# Altium PCB PCB1_I2C_datkll.PcbDoc
Units mil, origin at the board's own origin, x right, y up, seen from the top; angles counter-clockwise.
Board outline 3498.74 x 2755.91 mil, 2 copper layers (Top Layer, Bottom Layer); 9 components, 7 nets, 141 pads, 0 vias.
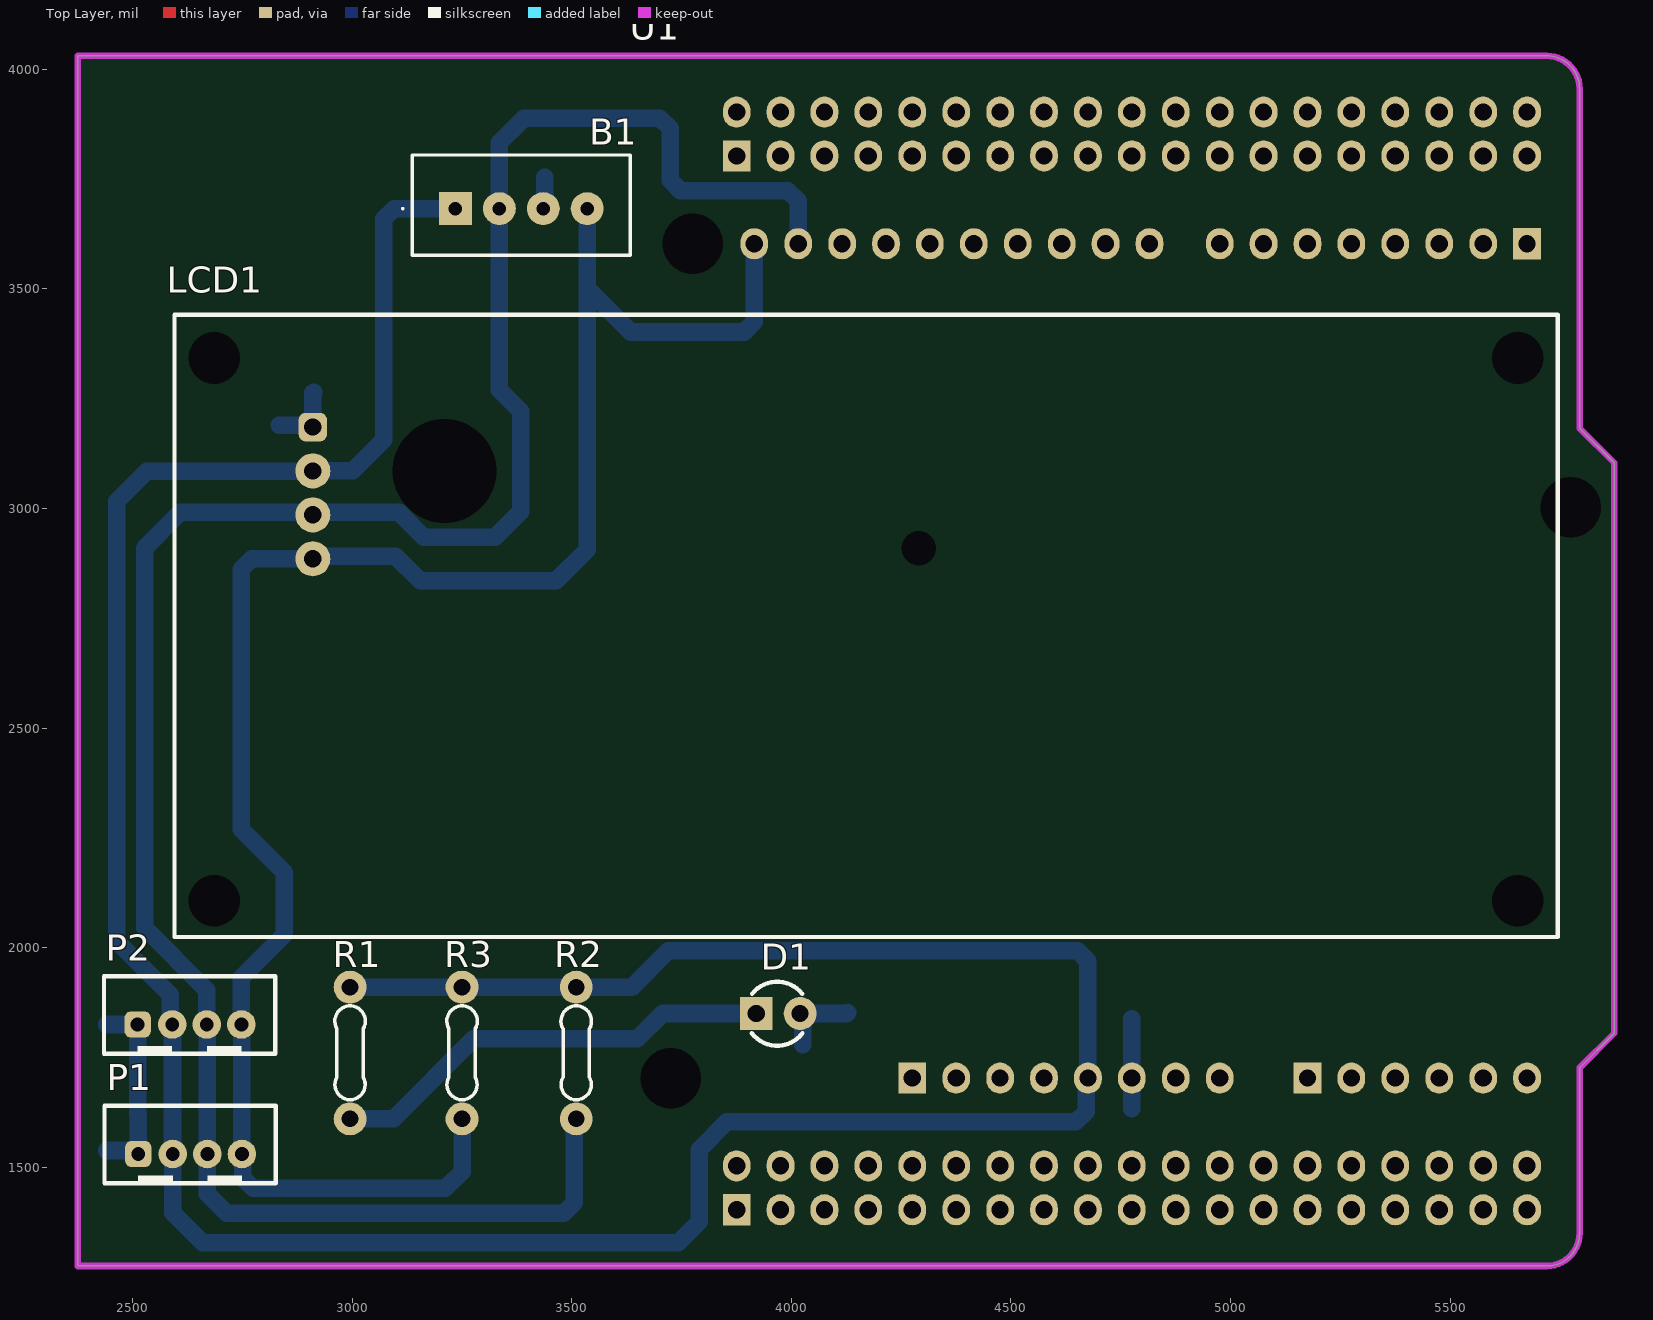
[diagram p0: Top Layer view]
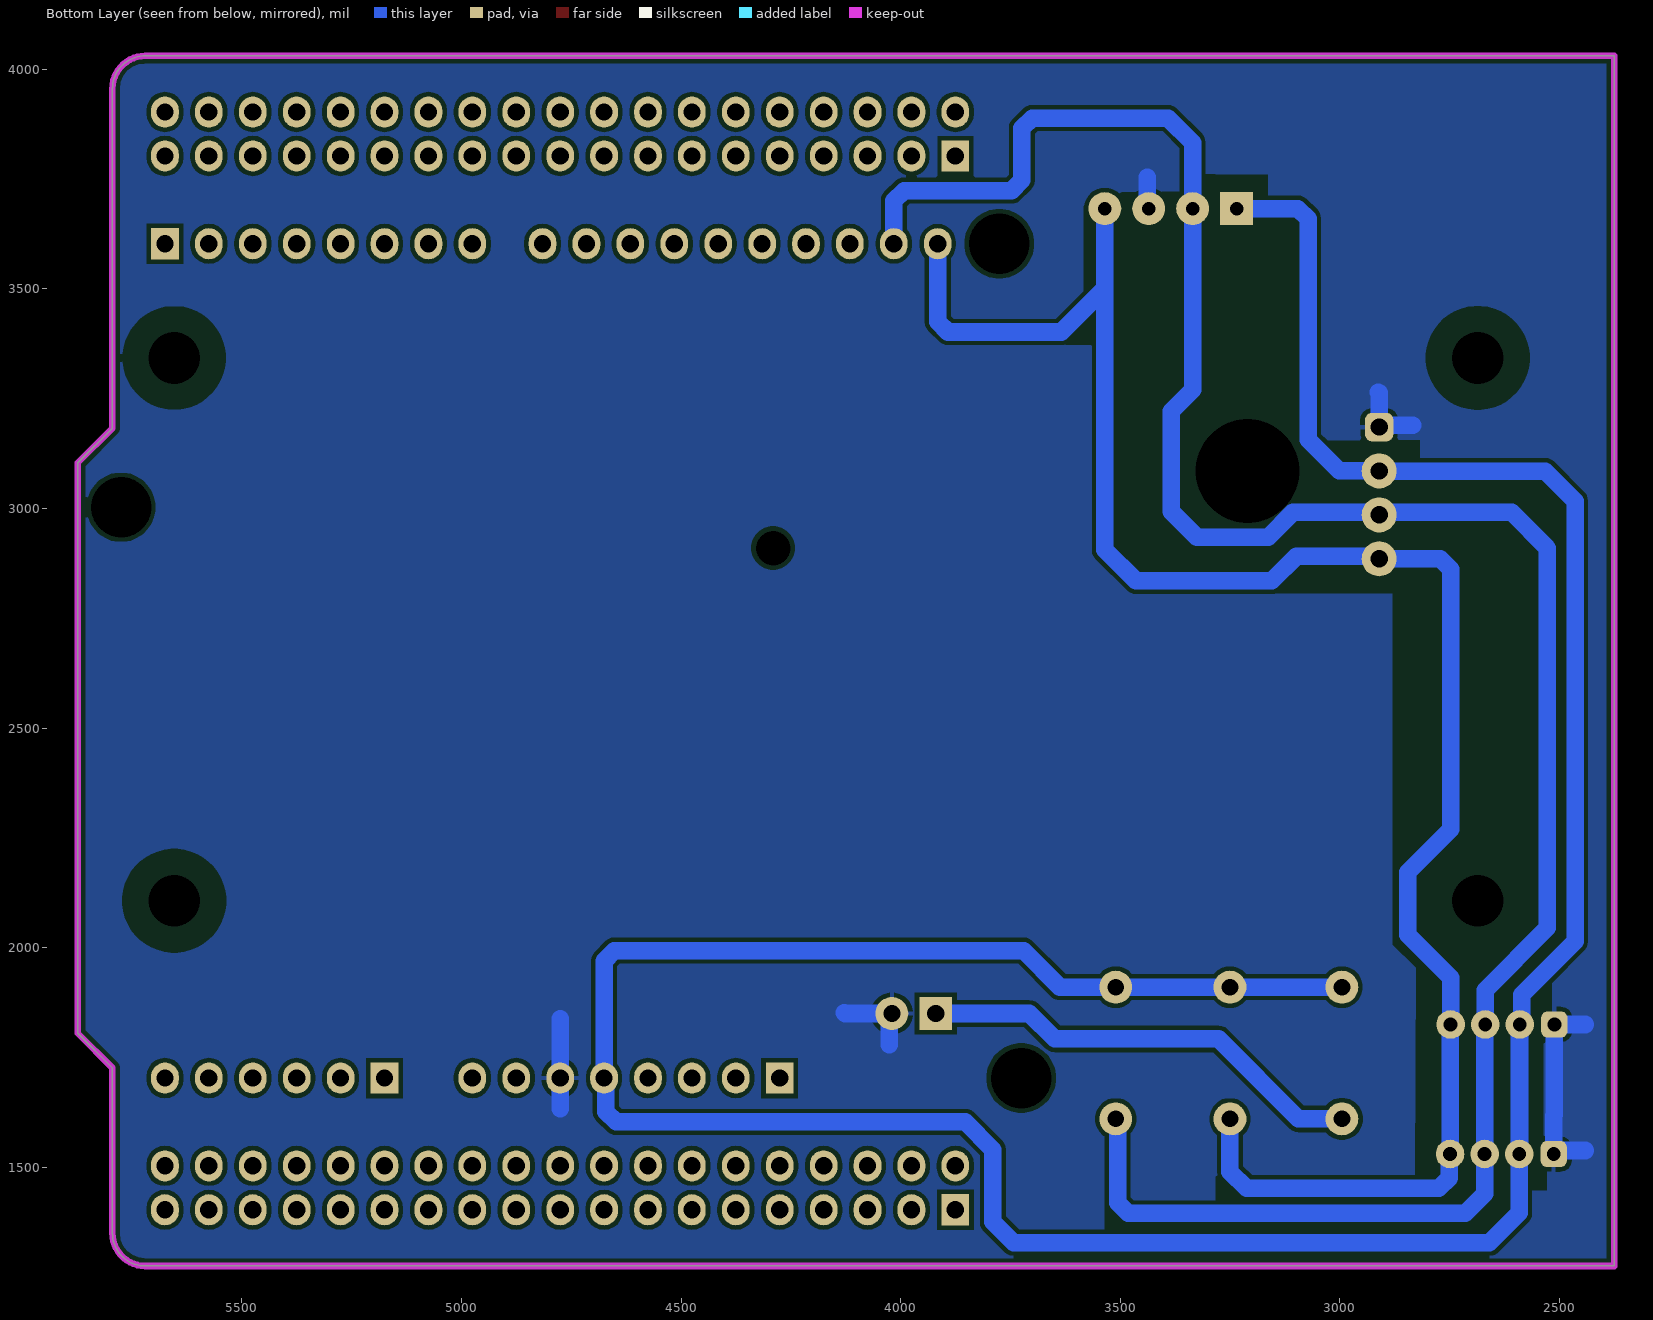
[diagram p1: Bottom Layer view, seen from below]
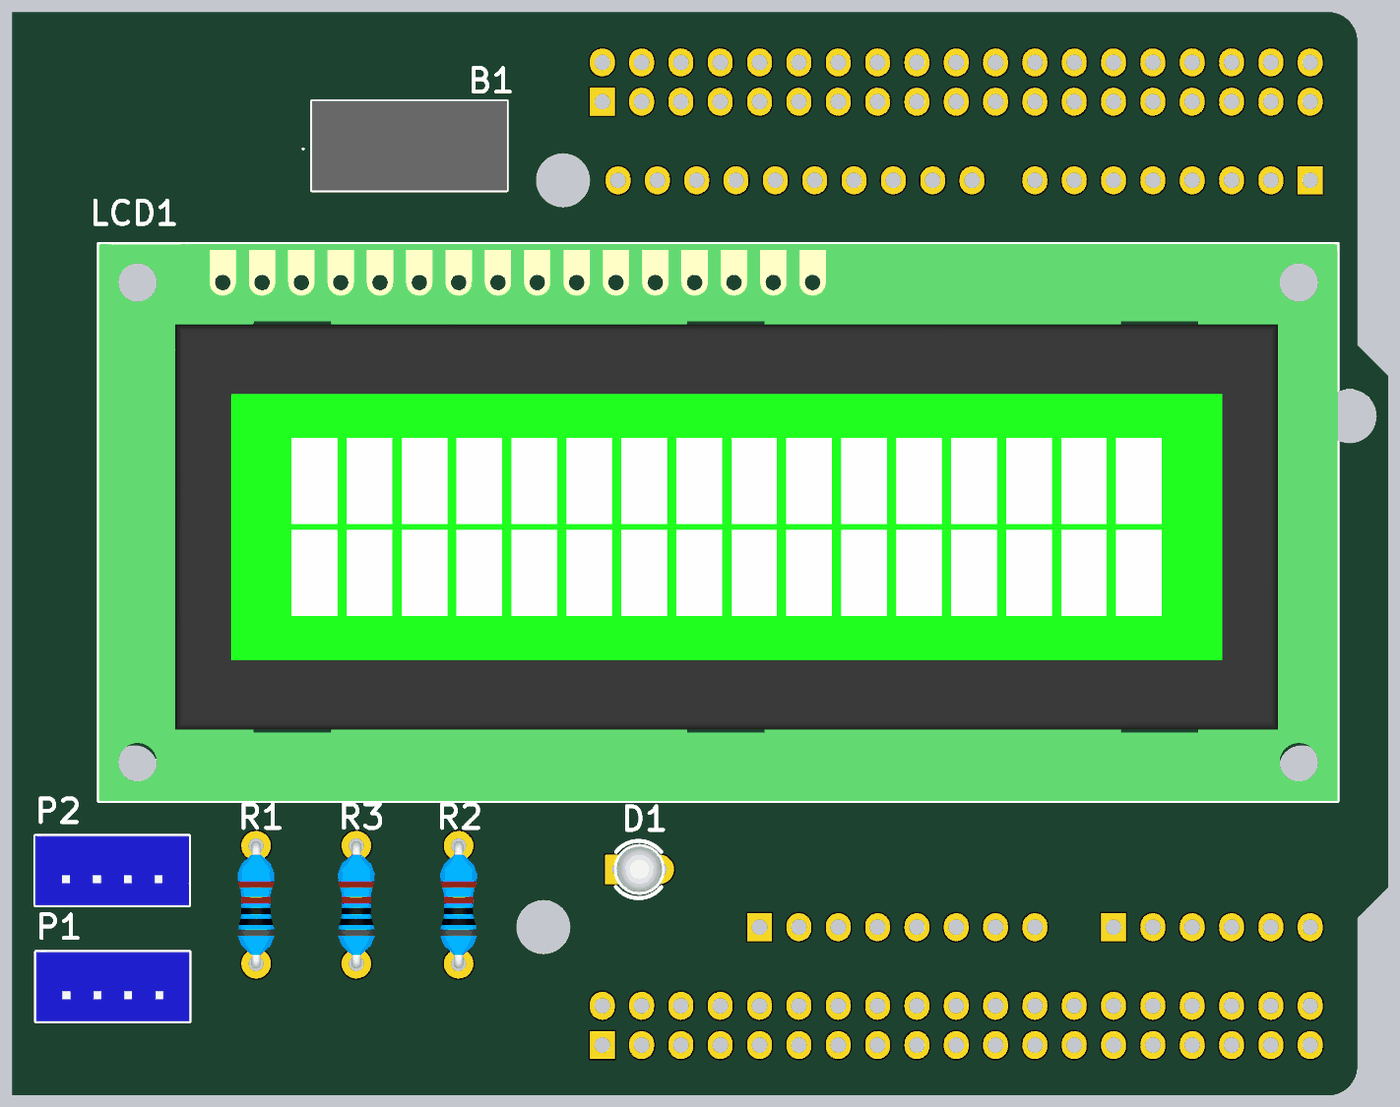
[diagram p2: 3D render of the assembled board from above, using the file's embedded part models]

## Layer stack, top to bottom
Top Solder: solder mask 0.4, Solder Resist, Dk 3.5
Top Layer: signal copper 1.4
Dielectric 1: dielectric 12.6, FR-4, Dk 4.8
Bottom Layer: signal copper 1.4
Bottom Solder: solder mask 0.4, Solder Resist, Dk 3.5

## Board outline
2375,1275 2375,4030.91 5720,4030.91 cw(c5720,3955.91) 5795,3955.91 5795,3182.87 5873.74,3104.13 5873.74,1804.92 5795,1726.18 5795,1350 cw(c5720,1350) 5720,1275

## Design rules (kind name [scope] priority, off if disabled: settings)
Clearance [All] p1: gap=10 ignorepadtopadclearanceinfootprint=FALSE
PolygonConnect [All] p1: connectstyle=Relief reliefconductorwidth=10 reliefentries=4 polygonreliefangle="90 Angle" airgapwidth=10
RoutingVias [All] p1: holewidth=28 width=50 viastyle="Through Hole" minholewidth=28 minwidth=50 maxholewidth=28 maxwidth=50
SolderMaskExpansion [All] p1: expansion=4 istentingtop=FALSE
Width [All] p1: maxlimit=50 minlimit=30 preferedwidth=40
30 further rules are at their usual default settings.

## Components (designator, comment, footprint, x,y, rotation, side; value= is the part's Value field where it differs from the comment)
B1 "DHT20" SEN18364 3235,3683 r0 top
D1 "Led" "LED 3MM - red" 3970,1850 r0 top
LCD1 "LCD 16x2" "LCD 1602A I2C" 4170,2719 r0 top
P1 "" HDR/Header/4/2mm/BOX 2630.63,1530 r0 top
P2 "Header 4" HDR/Header/4/2mm/BOX 2629.37,1825 r0 top
R1 "1k" "R 1/4W/300" 2995,1610 r90 top
R2 "4.7k" "R 1/4W/300" 3510,1610 r90 top
R3 "4.7k" "R 1/4W/300" 3250,1610 r90 top
U1 "NUCLEO-F103RB" NUCLEO 5795,1275 r90 top

## Footprints (in the part's own frame and the unit in brackets; to place one, negate y for a bottom-side part, rotate by r counter-clockwise, add the part's x,y. Pads: shape width x height; smd on the part's side, far side on the other; paste and mask are expansions set on the pad)
HDR/Header/4/2mm/BOX [mil]
  rrect50% 60x60 hole 31.5: 1(-118.11,0)
  round 65 hole 31.5: 2(-39.37,0) 3(39.37,0) 4(118.11,0)
  silkscreen extent -195,-67 195,110, body extent -195,-67 195,110, height 236
"LCD 1602A I2C" [mm]
  rrect50% 1.651x1.651 hole 1: 1(-32,11.85)
  round 2.032 hole 1: 2(-32,9.31) 3(-32,6.77) 4(-32,4.23)
  round 0 hole 6 unplated: HOLE(-24.38,9.31)
  round 0 hole 2 unplated: HOLE(3.06,4.85)
  round 0 hole 3 unplated: HOLG(37.7,-15.55) HOLH(-37.7,-15.55) HOLH(-37.7,15.85) HOLH(37.7,15.85)
  Top Layer pour cut-out: 34.7,15.85 34.928,14.702 35.579,13.729 36.552,13.078 37.7,12.85 37.7,12.85 38.848,13.078 39.821,13.729 40.472,14.702 40.7,15.85 40.7,15.85 40.472,16.998 39.821,17.971 38.848,18.622 37.7,18.85 37.7,18.85 36.552,18.622 35.579,17.971 34.928,16.998 34.7,15.85
  Top Layer pour cut-out: -40.7,15.85 -40.472,14.702 -39.821,13.729 -38.848,13.078 -37.7,12.85 -37.7,12.85 -36.552,13.078 -35.579,13.729 -34.928,14.702 -34.7,15.85 -34.7,15.85 -34.928,16.998 -35.579,17.971 -36.552,18.622 -37.7,18.85 -37.7,18.85 -38.848,18.622 -39.821,17.971 -40.472,16.998 -40.7,15.85
  Top Layer pour cut-out: -40.7,-15.55 -40.472,-16.698 -39.821,-17.671 -38.848,-18.322 -37.7,-18.55 -37.7,-18.55 -36.552,-18.322 -35.579,-17.671 -34.928,-16.698 -34.7,-15.55 -34.7,-15.55 -34.928,-14.402 -35.579,-13.429 -36.552,-12.778 -37.7,-12.55 -37.7,-12.55 -38.848,-12.778 -39.821,-13.429 -40.472,-14.402 -40.7,-15.55
  Top Layer pour cut-out: 34.7,-15.55 34.928,-16.698 35.579,-17.671 36.552,-18.322 37.7,-18.55 37.7,-18.55 38.848,-18.322 39.821,-17.671 40.472,-16.698 40.7,-15.55 40.7,-15.55 40.472,-14.402 39.821,-13.429 38.848,-12.778 37.7,-12.55 37.7,-12.55 36.552,-12.778 35.579,-13.429 34.928,-14.402 34.7,-15.55
  Bottom Layer pour cut-out: 34.7,15.85 34.928,14.702 35.579,13.729 36.552,13.078 37.7,12.85 37.7,12.85 38.848,13.078 39.821,13.729 40.472,14.702 40.7,15.85 40.7,15.85 40.472,16.998 39.821,17.971 38.848,18.622 37.7,18.85 37.7,18.85 36.552,18.622 35.579,17.971 34.928,16.998 34.7,15.85
  Bottom Layer pour cut-out: -40.7,15.85 -40.472,14.702 -39.821,13.729 -38.848,13.078 -37.7,12.85 -37.7,12.85 -36.552,13.078 -35.579,13.729 -34.928,14.702 -34.7,15.85 -34.7,15.85 -34.928,16.998 -35.579,17.971 -36.552,18.622 -37.7,18.85 -37.7,18.85 -38.848,18.622 -39.821,17.971 -40.472,16.998 -40.7,15.85
  Bottom Layer pour cut-out: -40.7,-15.55 -40.472,-16.698 -39.821,-17.671 -38.848,-18.322 -37.7,-18.55 -37.7,-18.55 -36.552,-18.322 -35.579,-17.671 -34.928,-16.698 -34.7,-15.55 -34.7,-15.55 -34.928,-14.402 -35.579,-13.429 -36.552,-12.778 -37.7,-12.55 -37.7,-12.55 -38.848,-12.778 -39.821,-13.429 -40.472,-14.402 -40.7,-15.55
  Bottom Layer pour cut-out: 34.7,-15.55 34.928,-16.698 35.579,-17.671 36.552,-18.322 37.7,-18.55 37.7,-18.55 38.848,-18.322 39.821,-17.671 40.472,-16.698 40.7,-15.55 40.7,-15.55 40.472,-14.402 39.821,-13.429 38.848,-12.778 37.7,-12.55 37.7,-12.55 36.552,-12.778 35.579,-13.429 34.928,-14.402 34.7,-15.55
  silkscreen extent -40,-17.65 40,18.35, body extent -40.61,-18.1 40.62,18.4, height 22
"LED 3MM - red" [mil]
  rect 75x75 hole 39: 1(-50,0)
  round 75 hole 39: 2(50,0)
  silkscreen extent -60,-73 55,72, body extent -66,-65 64,65, height 207
NUCLEO [mm]
  oval 1.8x1.6 hole 1: A5_1(59.13,24.88) A5_2(59.13,27.42) A5_3(59.13,29.96) A5_4(59.13,32.5) A5_5(59.13,35.04) A5_6(59.13,37.58) A5_7(59.13,40.12) A5_8(59.13,42.66) A5_9(59.13,45.2) A5_10(59.13,47.74) A6_2(10.87,36.06) A6_3(10.87,33.52) A6_4(10.87,30.98) A6_5(10.87,28.44) A6_6(10.87,25.9) A6_7(10.87,23.36) A6_8(10.87,20.82) A8_2(10.87,13.2) A8_3(10.87,10.66) A8_4(10.87,8.12) A8_5(10.87,5.58) A8_6(10.87,3.04) A9_2(59.13,5.58) A9_3(59.13,8.12) A9_4(59.13,10.66) A9_5(59.13,13.2) A9_6(59.13,15.74) A9_7(59.13,18.28) A9_8(59.13,20.82) M7_2(5.79,48.76) M7_3(3.25,46.22) M7_4(5.79,46.22) M7_5(3.25,43.68) M7_6(5.79,43.68) M7_7(3.25,41.14) M7_8(5.79,41.14) M7_9(3.25,38.6) M7_10(5.79,38.6) M7_11(3.25,36.06) M7_12(5.79,36.06) M7_13(3.25,33.52) M7_14(5.79,33.52) M7_15(3.25,30.98) M7_16(5.79,30.98) M7_17(3.25,28.44) M7_18(5.79,28.44) M7_19(3.25,25.9) M7_20(5.79,25.9) M7_21(3.25,23.36) M7_22(5.79,23.36) M7_23(3.25,20.82) M7_24(5.79,20.82) M7_25(3.25,18.28) M7_26(5.79,18.28) M7_27(3.25,15.74) M7_28(5.79,15.74) M7_29(3.25,13.2) M7_30(5.79,13.2) M7_31(3.25,10.66) M7_32(5.79,10.66) M7_33(3.25,8.12) M7_34(5.79,8.12) M7_35(3.25,5.58) M7_36(5.79,5.58) M7_37(3.25,3.04) M7_38(5.79,3.04) M10_2(66.75,48.76) M10_3(64.21,46.22) M10_4(66.75,46.22) M10_5(64.21,43.68) M10_6(66.75,43.68) M10_7(64.21,41.14) M10_8(66.75,41.14) M10_9(64.21,38.6) M10_10(66.75,38.6) M10_11(64.21,36.06) M10_12(66.75,36.06) M10_13(64.21,33.52) M10_14(66.75,33.52) M10_15(64.21,30.98) M10_16(66.75,30.98) M10_17(64.21,28.44) M10_18(66.75,28.44) M10_19(64.21,25.9) M10_20(66.75,25.9) M10_21(64.21,23.36) M10_22(66.75,23.36) M10_23(64.21,20.82) M10_24(66.75,20.82) M10_25(64.21,18.28) M10_26(66.75,18.28) M10_27(64.21,15.74) M10_28(66.75,15.74) M10_29(64.21,13.2) M10_30(66.75,13.2) M10_31(64.21,10.66) M10_32(66.75,10.66) M10_33(64.21,8.12) M10_34(66.75,8.12) M10_35(64.21,5.58) M10_36(66.75,5.58) M10_37(64.21,3.04) M10_38(66.75,3.04)
  rect 1.8x1.6 hole 1: A6_1(10.87,38.6) A8_1(10.87,15.74) A9_1(59.13,3.04) M7_1(3.25,48.76) M10_1(64.21,48.76)
  round 0 hole 3.5 unplated: HOLD(10.87,52.57) HOLD(43.89,0.5) HOLD(59.13,51.3)
  Keep-Out Layer lines w0.381: 0,86.868 0,1.905 ccw(c1.905,1.905) 1.905,0 11.46,0 13.46,-2 46.46,-2 48.46,0 68.095,0 ccw(c68.095,1.905) 70,1.905 70,86.868 0,86.868
"R 1/4W/300" [mil] "Through hole resitor, axial 300mils, 1/4W"
  round 75 hole 38: 1(0,0) 2(300,0)
  silkscreen extent 44,-35 257,35, body extent -12,-47 312,47, height 97
SEN18364 [mm]
  rect 1.905x1.905 hole 0.78: 1(0,0)
  round 1.905 hole 0.78: 2(2.54,0) 3(5.08,0) 4(7.62,0)
  silkscreen extent -3.1,-2.7 10.11,3.1, body extent -10,-3.38 10,3.38, height 5.8

## Part data
B1: library part SEN-18364, "Multiple Function Sensor Modules Humidity and Temperature Sensor - DHT20", Manufacturer_Name=SparkFun, Mouser Part Number=474-SEN-18364, Datasheet Link=https://cdn.sparkfun.com/assets/8/a/1/5/0/DHT20.pdf, Geometry.Height=16.3mm, Manufacturer_Part_Number=SEN-18364, Mouser Price/Stock=https://www.mouser.co.uk/ProductDetail/SparkFun/SEN-18364?qs=QNEnbhJQKvbVltiDzPDFyg%3D%3D
D1: "Typical LED"
LCD1: "Character LCD 16x2"
P1: library part "Header 4", "Header, 4-Pin"
P2: "Header, 4-Pin"
R1 R2 R3: library part Resistor, "Resistor"
U1: "STM32F103RB, mbed-Enabled Development Nucleo-64 STM32F1 ARM® Cortex®-M3 MCU 32-Bit Embedded Evaluation Board", Manufacturer=STMicroelectronics, BRAND=STMicroelectronics, Manufacturer Product Number=NUCLEO-F103RB, PART NO=NUCLEO-F103RB, STOCK CODE=497-14362-ND, SUPPLIER=digi-key, TYPE="EVAL BRD"

## Nets (pads, with @x,y where several pads share a name; then routed paths per layer and width w, separated by ;. In a path a pad name is that pad's centre, name@x,y a point inside that pad or via, vN(x,y) a via of type N, cw(c..) or ccw(c..) an arc to the next point about the centre after c; other vN are vias at no path point)
+VCC: B1.1 LCD1.2 P1.2 P2.2 R1.2 R2.2 R3.2 U1.A6_5 | length 7411.5
  Bottom Layer w40: P2.2 2585.22,1829.78 2585.22,1893.07 2464,2014.29 2464,3017 2531.84,3084.84 LCD1.2@2910.16,3084.84 ; P2.2@2590.63,1824.37 2590.63,1530.63 P1.2 2591.26,1395.74 2659,1328 3742.57,1328 3790,1375.43 3790,1540 3853.1,1603.1 4648.07,1603.1 4671.5,1626.53 4671.5,1699.14 U1.A6_5 4675.31,1969.57 4651.88,1993 3720,1993 3637,1910 R2.2 R3.2 R1.2 ; LCD1.2 3000.7,3085.54 3072,3156.84 3072,3659.57 3095.43,3683 B1.1
GND: B1.3 D1.2 LCD1.1 P1.1 P2.1 U1.A6_6 | length 1059.2
  Bottom Layer w40: 2440.83,1825 P2.1 2511.26,1618.78 2512.52,1617.52 P1.1 2504.52,1538 2441,1538 ; 2834,3190 2905.69,3190 LCD1.1 2910.16,3263.16 2912,3265 ; B1.3 3438,3686 3438,3754 ; 4026,1779 4026,1844 D1.2 4126,1850 4128,1852 ; 4775.31,1632.68 U1.A6_6 4775.31,1838.32
NetD1_1: D1.1 R1.1 | length 1024.4
  Bottom Layer w40: R1.1 3094,1610 3276,1792 3649,1792 3707,1850 D1.1
SCL: B1.4 LCD1.4 P1.4 P2.4 R3.1 U1.A5_10 | length 4325.7
  Bottom Layer w40: LCD1.4 2770.91,2885.54 2747.48,2862.1 2747.48,2269.52 2845,2172 2845,2029 2747.48,1931.48 P2.4 2748.11,1824.37 2748.11,1530.63 2750.99,1527.75 2750.99,1475.43 2774.42,1452 3212,1452 3250,1490 R3.1 ; LCD1.4@2934.03,2890.4 2935.16,2891.54 3098.46,2891.54 3155,2835 3464,2835 3535,2906 3535,3501 ; B1.4 3535,3501 ; U1.A5_10 3915.47,3425.43 3892.04,3402 3634,3402 3535,3501
SDA: B1.2 LCD1.3 P1.3 P2.3 R2.1 U1.A5_9 | length 5332.6
  Bottom Layer w40: P1.3@2669.37,1530 2669.37,1824.37 P2.3 2668.74,1903.26 2527,2045 2527,2910 2608.54,2991.54 2935.16,2991.54 3106.46,2991.54 3163,2935 3325,2935 3383.27,2993.27 3383.27,3221.73 3335,3270 B1.2 3335,3833 3391,3889 3700.57,3889 3724,3865.57 3724,3747.43 3747.43,3724 3992.04,3724 4015.47,3700.57 U1.A5_9 ; P1.3 2669.97,1439.03 2714,1395 3482,1395 3505.79,1418.79 3505.79,1605.79 R2.1
UART_RX: U1.A9_1
UART_TX: U1.A9_2
pads on no net: LCD1.HOLE LCD1.HOLG LCD1.HOLH U1.A5_1 U1.A5_2 U1.A5_3 U1.A5_4 U1.A5_5 U1.A5_6 U1.A5_7 U1.A5_8 U1.A6_1 U1.A6_2 U1.A6_3 U1.A6_4 U1.A6_7 U1.A6_8 U1.A8_1 U1.A8_2 U1.A8_3 U1.A8_4 U1.A8_5 U1.A8_6 U1.A9_3 U1.A9_4 U1.A9_5 U1.A9_6 U1.A9_7 U1.A9_8 U1.HOLD U1.M7_1 U1.M7_2 U1.M7_3 U1.M7_4 U1.M7_5 U1.M7_6 U1.M7_7 U1.M7_8 U1.M7_9 U1.M7_10 U1.M7_11 U1.M7_12 U1.M7_13 U1.M7_14 U1.M7_15 U1.M7_16 U1.M7_17 U1.M7_18 U1.M7_19 U1.M7_20 U1.M7_21 U1.M7_22 U1.M7_23 U1.M7_24 U1.M7_25 U1.M7_26 U1.M7_27 U1.M7_28 U1.M7_29 U1.M7_30 U1.M7_31 U1.M7_32 U1.M7_33 U1.M7_34 U1.M7_35 U1.M7_36 U1.M7_37 U1.M7_38 U1.M10_1 U1.M10_2 U1.M10_3 U1.M10_4 U1.M10_5 U1.M10_6 U1.M10_7 U1.M10_8 U1.M10_9 U1.M10_10 U1.M10_11 U1.M10_12 U1.M10_13 U1.M10_14 U1.M10_15 U1.M10_16 U1.M10_17 U1.M10_18 U1.M10_19 U1.M10_20 U1.M10_21 U1.M10_22 U1.M10_23 U1.M10_24 U1.M10_25 U1.M10_26 U1.M10_27 U1.M10_28 U1.M10_29 U1.M10_30 U1.M10_31 U1.M10_32 U1.M10_33 U1.M10_34 U1.M10_35 U1.M10_36 U1.M10_37 U1.M10_38

## Polygon pours and split planes (outlines as drawn)
GND on Bottom Layer "GND_L02_P000" (solid, remove dead copper, pour order 0): 2376,4027 2381,4032 5744,4032 5798,3978 5798,3178 5872,3104 5872,1797 5869,1797 5795,1723 5795,1329 5742,1276 2373,1276 2373,4030 2378,4035

## Other copper
Bottom Layer:
  pour cut-out: 2778.37,1905.37 2778.37,1560.47 2781.25,1557.6 2781.25,1487.97 2786.95,1482.26 2787.69,1483 2829.66,1483 2827.27,1954.27
  pour cut-out: 2848,2852.59 2848,2805.77 3147.17,2805.77 3094.62,2852.59
  pour cut-out: 3163,3708 3163,3716 3163,3761.5 3283,3761.5 3283,3710
  pour cut-out: 3582.5,3689.25 3584,3687.75 3584,3494.79 3565.26,3513.53 3565.26,3672.01
  pour cut-out: 3405.83,3721.01 3405.83,3659.17 3412,3653 3460,3653 3464.17,3721.01 3498,3721.01 3505.83,3245.29 3508,3243.13 3404.66,3243.13 3365.26,3282.53 3365.26,3722
  pour cut-out: 3092,3652 3103,3663 3193,3663 3193,3641 3282.5,3641 3282.5,3762 3315,3762 3315,3261 3364,3212 3364,3000 3318,2954 3172,2954 3113,3013 2946.11,3013 2926.07,3033.04 2926.07,3038.04 2927.04,3038.04 2954,3065 3009,3065 3097,3153 3092,3158
  pour cut-out: 2516.26,1865.49 2516.26,1919.74 2554.96,1881.04 2554.96,1853.78 2554.87,1853.69 2554.57,1853.99 2527.76,1853.99
  pour cut-out: 2625,1513 2635.14,1513 2648,1498 2648,1428 2652,1428 2710,1370 2710.77,1370.77 3499.71,1370.77 3502.97,1374.03 3536,1418.74 3536,1354 2671,1354 2617,1408 2616,1408 2616,1499
  pour cut-out: 2557.53,1506.07 2561,1500.15 2561,1446 2527.52,1446 2527.52,1506.07
  pour cut-out: 2693,1499 2729.57,1499 2730.38,1466.62 2766.74,1430.26 3232.95,1430.26 3279.23,1482.17 3283,1478.4 3283,1419 2722,1419 2693,1448
  pour cut-out: 2817,3156.33 2817,3114 2995.28,3114 3027,3155.22
  pour cut-out: 2926.1,2938.04 2949.35,2961.28 3093.97,2961.28 3146.45,2908.8 3408.21,2908.8 3408.21,3243.13 3508,3243.13 3508,2918 3452,2862 3162,2862 3108,2916 2948.98,2916 2926.1,2933.04
  pour cut-out: 2620.89,1797.88 2620.89,1560.47 2628.13,1553.23 2628.13,1551.14 2633.13,1551.14 2639.11,1557.12 2639.11,1796.62 2631.87,1803.86 2626.87,1803.86 2631.87,1803.86 2626.87,1803.86
  pour cut-out: 2710.61,1803.86 2717.85,1796.62 2717.85,1557.12 2711.87,1551.14 2706.87,1551.14 2706.87,1553.23 2699.63,1560.47 2699.63,1797.88 2705.61,1803.86 2710.61,1803.86 2705.61,1803.86
  pour cut-out: 2553.45,1800.85 2553.67,1801.07 2554.74,1801.07 2560.37,1795.44 2560.37,1558.3 2560.37,1556.78 2550.87,1556.78 2535,1556.78 2535,1785.34 2550.73,1801.07 2554.74,1801.07
  pour cut-out: 2699,1854.85 2705.61,1848.23 2705.61,1846.14 2710.61,1846.14 2731.44,1866.96 2739.89,1866.96 2879.9,2006.98 2879.9,2918.69 2894.24,2933.04 2894.24,2938.04 2889.67,2938.04 2866.43,2961.28 2621.07,2961.28 2557.26,2897.47 2557.26,2051.8 2699,1910.06 2699,1852.75 2705.61,1846.14
  pour cut-out: 2875.21,3014 2601,3014 2508.42,2921.42 2485.42,2921.42 2486,2922 2486,3009 2541,3064 2543,3062 2870.28,3062 2894.24,3038.04 2894.24,3033.04 2894.24,3038.04 2894.24,3033.04
Multi-Layer:
  pour cut-out: 3568,3425 3620,3373 3620,3372 3566,3372 3565,3373 3566,3374 3566,3426